# Altium PCB front_7_ea7gib8.PcbDoc
Units mil, origin at the board's own origin, x right, y up, seen from the top; angles counter-clockwise.
Board outline 11127.6 x 5706 mil, 2 copper layers (Top, Bottom); 142 components, 10 nets, 140 pads, 27 vias.
Unrouted connection lines stored in the file: 18.
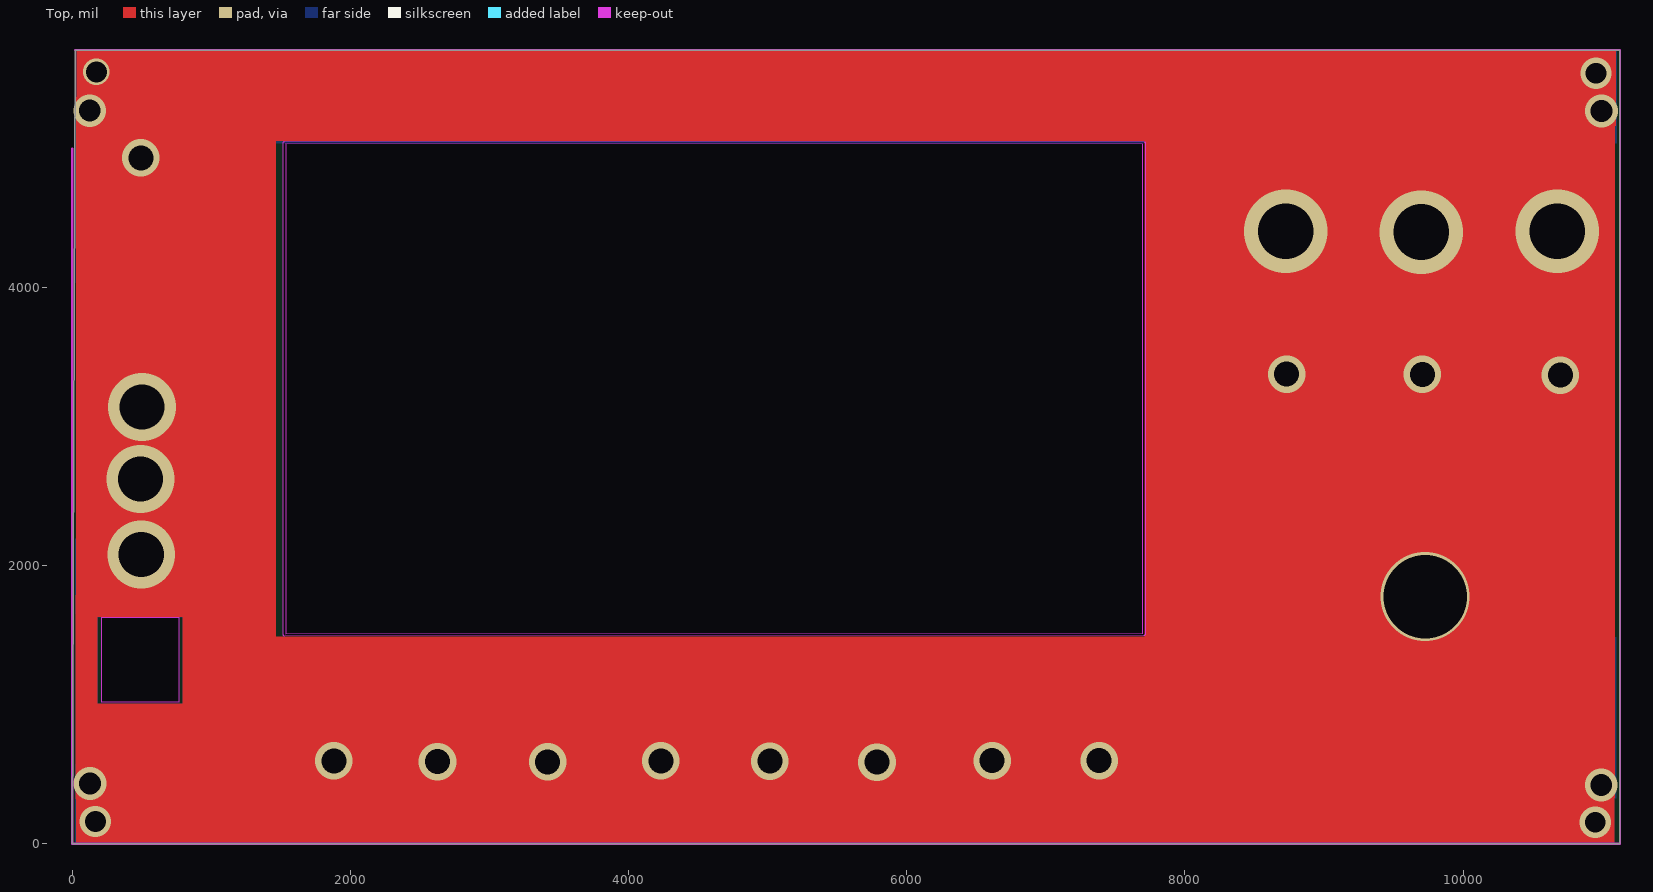
[diagram p0: Top view]
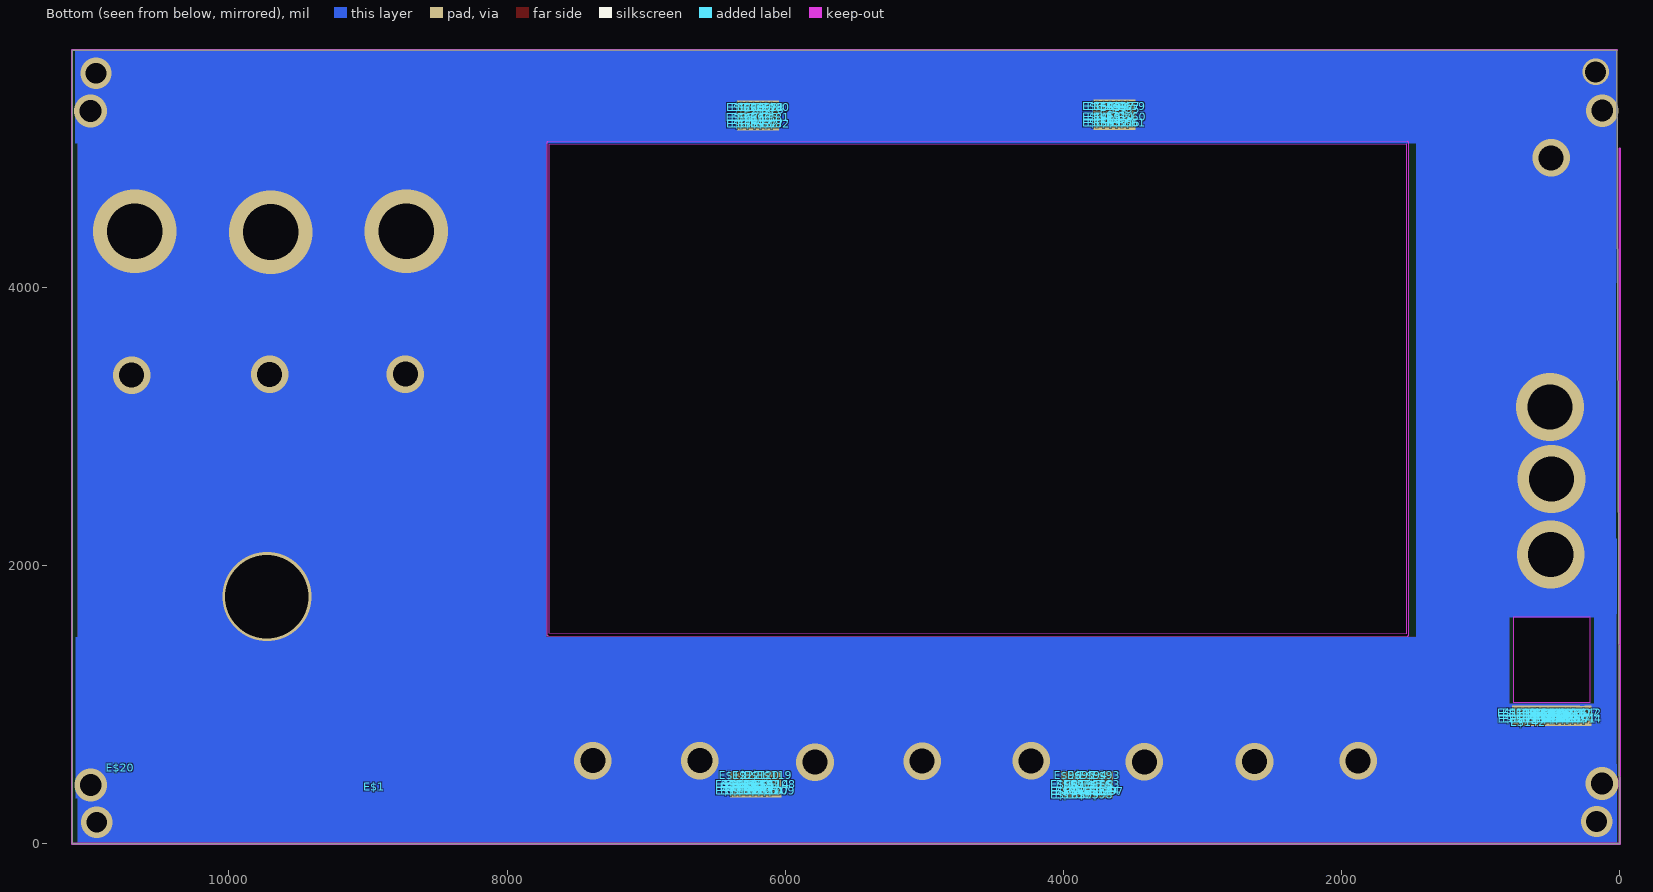
[diagram p1: Bottom view, seen from below]

## Layer stack, top to bottom
Top Solder: solder mask 0.4, Solder Resist, Dk 3.5
Top: signal copper 1.378
Dielectric 1: dielectric 12.6, FR-4, Dk 4.8
Bottom: signal copper 1.378
Bottom Solder: solder mask 0.4, Solder Resist, Dk 3.5

## Board outline
22.8,5706 11127.6,5706 11127.6,0 0,0 0,7.2 1.2,7.2
cut-out: 1535.41,5032.29 1535.41,4821 1535.56,4820.78 1536.18,4817.66 1536.18,1508.89 7697.63,1513.16 7698.48,5029.9
cut-out: 7706.64,5046.21 7708.42,5045.85 7709.76,5045.59 7709.76,5045.58 7711.24,5044.6 7712.41,5043.82 7713.19,5042.64 7714.18,5041.17 7714.44,5039.82 7714.8,5038.05 7713.94,1505.01 7713.63,1503.49 7713.32,1501.89 7713.31,1501.89 7712.46,1500.61 7711.55,1499.25 7711.55,1499.24 7710.18,1498.33 7708.91,1497.48 7708.9,1497.48 7708.9,1497.47 7707.31,1497.16 7705.79,1496.85 1528.03,1492.57 1528.02,1492.57 1526.49,1492.88 1524.9,1493.19 1523.61,1494.06 1522.26,1494.96 1522.25,1494.96 1521.35,1496.31 1520.49,1497.6 1520.49,1497.61 1520.48,1497.61 1520.17,1499.19 1519.86,1500.72 1519.86,1500.73 1519.86,4780.52 1519.71,4780.74 1519.09,4783.86 1519.09,5040.45 1519.41,5042.03 1519.71,5043.57 1519.72,5043.57 1520.6,5044.9 1521.48,5046.22 1522.8,5047.1 1524.13,5047.99 1525.7,5048.3 1527.25,5048.61
cut-out: 212.98,1018.45 212.98,1628.01 766.33,1628.01 766.33,1018.45

## Design rules (kind name [scope] priority, off if disabled: settings)
BoardOutlineClearance mdCopperDimension [All] p1: gap=10 ignorepadtopadclearanceinfootprint=FALSE except(0: Arc-SplitContinuation Track-SplitContinuation SMDPad-SplitContinuation THPad-SplitContinuation Via-SplitContinuation Fill-SplitContinuation Poly-SplitContinuation Region-SplitContinuation Text-SplitContinuation; 40: Poly-OutlineEdge Poly-CavityEdge Poly-CutoutEdge Poly-SplitBarrior)
Clearance "Clearance (Same Net)" [All] p1: gap=8 ignorepadtopadclearanceinfootprint=FALSE
Clearance [All] p2: gap=8 ignorepadtopadclearanceinfootprint=FALSE
HoleSize [All] p1: absolutevalues=TRUE maxlimit=100000 minlimit=24 maxpercent=80.000 minpercent=20.000
HoleToHoleClearance mdDrill [All] p1: gap=8 allowstackedmicrovias=TRUE
MinimumSolderMaskSliver [All] p1 off: minsoldermaskwidth=10
PasteMaskExpansion mlMinCreamFrame [All] p1: expansion=0
PolygonConnect ThermalVias [IsVia] p1: connectstyle=Direct reliefconductorwidth=10 reliefentries=4 polygonreliefangle="90 Angle" airgapwidth=10
PolygonConnect [All] p2: connectstyle=Relief reliefconductorwidth=10 reliefentries=4 polygonreliefangle="90 Angle" airgapwidth=10
RoutingVias [All] p1: holewidth=24 width=40 viastyle="Through Hole" minholewidth=24 minwidth=40 maxholewidth=100 maxwidth=100
SolderMaskExpansion mlMinStopFrame [All] p1: expansion=4 istentingtop=FALSE
Width [All] p1: maxlimit=10000 minlimit=10 preferedwidth=10
26 further rules are at their usual default settings.

## Components (designator, comment, footprint, x,y, rotation, side; value= is the part's Value field where it differs from the comment)
E$1 "" CC-NC-BY 8955.6,411.6 r180 bottom
E$2 "" SMD1,27-2,54 3837.6,384 r180 bottom
E$3 "" SMD1,27-2,54 3668.4,428.4 r180 bottom
E$4 "" SMD1,27-2,54 3669.6,382.8 r180 bottom
E$5 "" SMD1,27-2,54 3793.2,428.4 r180 bottom
E$6 "" SMD1,27-2,54 3921.6,382.8 r180 bottom
E$7 "" SMD1,27-2,54 3922.8,428.4 r180 bottom
E$8 "" SMD1,27-2,54 3711.6,427.2 r180 bottom
E$9 "" SMD1,27-2,54 6146.4,411.6 r180 bottom
E$10 "" SMD1,27-2,54 310.8,943.2 r180 bottom
E$11 "" SMD1,27-2,54 6188.4,411.6 r180 bottom
E$12 "" SMD1,27-2,54 405.6,943.2 r180 bottom
E$13 "" SMD1,27-2,54 450,943.2 r180 bottom
E$14 "" SMD1,27-2,54 3588,5227.2 r180 bottom
E$15 "" SMD1,27-2,54 3682.8,5227.2 r180 bottom
E$16 "" SMD1,27-2,54 3748.8,428.4 r180 bottom
E$17 "" SMD1,27-2,54 310.8,897.6 r180 bottom
E$18 "" SMD1,27-2,54 3843.6,428.4 r180 bottom
E$19 "" SMD1,27-2,54 3888,428.4 r180 bottom
E$20 "" EA5GVK1 10779.6,547.2 r180 bottom
E$21 "" SMD1,27-2,54 422.4,943.2 r180 bottom
E$22 "" SMD1,27-2,54 517.2,943.2 r180 bottom
E$23 "" SMD1,27-2,54 561.6,943.2 r180 bottom
E$24 "" SMD1,27-2,54 3748.8,382.8 r180 bottom
E$25 "" SMD1,27-2,54 3792,382.8 r180 bottom
E$26 "" SMD1,27-2,54 422.4,897.6 r180 bottom
E$27 "" SMD1,27-2,54 3888,382.8 r180 bottom
E$28 "" SMD1,27-2,54 465.6,897.6 r180 bottom
E$29 "" SMD1,27-2,54 3709.2,382.8 r180 bottom
E$30 "" SMD1,27-2,54 561.6,897.6 r180 bottom
E$31 "" SMD1,27-2,54 6229.2,411.6 r180 bottom
E$32 "" SMD1,27-2,54 6277.2,411.6 r180 bottom
E$33 "" SMD1,27-2,54 6324,411.6 r180 bottom
E$34 "" SMD1,27-2,54 6368.4,411.6 r180 bottom
E$35 "" SMD1,27-2,54 382.8,897.6 r180 bottom
E$36 "" SMD1,27-2,54 342,943.2 r180 bottom
E$37 "" SMD1,27-2,54 343.2,897.6 r180 bottom
E$38 "" SMD1,27-2,54 595.2,897.6 r180 bottom
E$39 "" SMD1,27-2,54 354,897.6 r180 bottom
E$40 "" SMD1,27-2,54 450,897.6 r180 bottom
E$41 "" SMD1,27-2,54 271.2,897.6 r180 bottom
E$42 "" SMD1,27-2,54 230.4,943.2 r180 bottom
E$43 "" SMD1,27-2,54 596.4,943.2 r180 bottom
E$44 "" SMD1,27-2,54 231.6,897.6 r180 bottom
E$45 "" SMD1,27-2,54 511.2,898.8 r180 bottom
E$46 "" SMD1,27-2,54 3727.2,5227.2 r180 bottom
E$47 "" SMD1,27-2,54 3588,5300.4 r180 bottom
E$48 "" SMD1,27-2,54 3636,5300.4 r180 bottom
E$49 "" SMD1,27-2,54 3684,5300.4 r180 bottom
E$50 "" SMD1,27-2,54 3727.2,5300.4 r180 bottom
E$51 "" SMD1,27-2,54 3588,5181.6 r180 bottom
E$52 "" SMD1,27-2,54 3631.2,5181.6 r180 bottom
E$53 "" SMD1,27-2,54 3681.6,5181.6 r180 bottom
E$54 "" SMD1,27-2,54 3727.2,5181.6 r180 bottom
E$55 "" SMD1,27-2,54 3548.4,5281.2 r180 bottom
E$56 "" SMD1,27-2,54 3548.4,5181.6 r180 bottom
E$57 "" SMD1,27-2,54 3548.4,5300.4 r180 bottom
E$58 "" SMD1,27-2,54 3634.8,5245.2 r180 bottom
E$59 "" SMD1,27-2,54 3508.8,5300.4 r180 bottom
E$60 "" SMD1,27-2,54 3507.6,5227.2 r180 bottom
E$61 "" SMD1,27-2,54 3508.8,5181.6 r180 bottom
E$62 "" SMD1,27-2,54 3760.8,5300.4 r180 bottom
E$63 "" SMD1,27-2,54 3760.8,5181.6 r180 bottom
E$64 "" SMD1,27-2,54 3762,5227.2 r180 bottom
E$65 "" SMD1,27-2,54 6148.8,5221.2 r180 bottom
E$66 "" SMD1,27-2,54 6243.6,5221.2 r180 bottom
E$67 "" SMD1,27-2,54 6288,5221.2 r180 bottom
E$68 "" SMD1,27-2,54 6148.8,5294.4 r180 bottom
E$69 "" SMD1,27-2,54 6196.8,5294.4 r180 bottom
E$70 "" SMD1,27-2,54 6244.8,5294.4 r180 bottom
E$71 "" SMD1,27-2,54 6288,5294.4 r180 bottom
E$72 "" SMD1,27-2,54 6148.8,5175.6 r180 bottom
E$73 "" SMD1,27-2,54 6192,5175.6 r180 bottom
E$74 "" SMD1,27-2,54 6242.4,5175.6 r180 bottom
E$75 "" SMD1,27-2,54 6288,5175.6 r180 bottom
E$76 "" SMD1,27-2,54 6109.2,5275.2 r180 bottom
E$77 "" SMD1,27-2,54 6109.2,5175.6 r180 bottom
E$78 "" SMD1,27-2,54 6109.2,5294.4 r180 bottom
E$79 "" SMD1,27-2,54 6195.6,5239.2 r180 bottom
E$80 "" SMD1,27-2,54 6069.6,5294.4 r180 bottom
E$81 "" SMD1,27-2,54 6068.4,5221.2 r180 bottom
E$82 "" SMD1,27-2,54 6069.6,5175.6 r180 bottom
E$83 "" SMD1,27-2,54 6321.6,5294.4 r180 bottom
E$84 "" SMD1,27-2,54 6321.6,5175.6 r180 bottom
E$85 "" SMD1,27-2,54 6322.8,5221.2 r180 bottom
E$86 "" SMD1,27-2,54 466.8,943.2 r180 bottom
E$87 "" SMD1,27-2,54 385.2,942 r180 bottom
E$88 "" SMD1,27-2,54 3952.8,428.4 r180 bottom
E$89 "" SMD1,27-2,54 3954,382.8 r180 bottom
E$90 "" SMD1,27-2,54 3991.2,428.4 r180 bottom
E$91 "" SMD1,27-2,54 3991.2,381.6 r180 bottom
E$92 "" SMD1,27-2,54 6132,428.4 r180 bottom
E$93 "" SMD1,27-2,54 3693.6,493.2 r270 bottom
E$94 "" SMD1,27-2,54 3781.2,493.2 r270 bottom
E$95 "" SMD1,27-2,54 3868.8,493.2 r270 bottom
E$96 "" SMD1,27-2,54 3967.2,493.2 r270 bottom
E$97 "" SMD1,27-2,54 3668.4,378 r0 bottom
E$98 "" SMD1,27-2,54 3742.8,352.8 r270 bottom
E$99 "" SMD1,27-2,54 3838.8,352.8 r270 bottom
E$100 "" SMD1,27-2,54 3933.6,352.8 r270 bottom
E$101 "" SMD1,27-2,54 3967.2,352.8 r270 bottom
E$102 "" SMD1,27-2,54 6226.8,428.4 r180 bottom
E$103 "" SMD1,27-2,54 6271.2,428.4 r180 bottom
E$104 "" SMD1,27-2,54 6132,382.8 r180 bottom
E$105 "" SMD1,27-2,54 6175.2,382.8 r180 bottom
E$106 "" SMD1,27-2,54 6271.2,382.8 r180 bottom
E$107 "" SMD1,27-2,54 6092.4,382.8 r180 bottom
E$108 "" SMD1,27-2,54 6051.6,428.4 r180 bottom
E$109 "" SMD1,27-2,54 6052.8,382.8 r180 bottom
E$110 "" SMD1,27-2,54 6304.8,382.8 r180 bottom
E$111 "" SMD1,27-2,54 6306,428.4 r180 bottom
E$112 "" SMD1,27-2,54 6220.8,384 r180 bottom
E$113 "" SMD1,27-2,54 6176.4,428.4 r180 bottom
E$114 "" SMD1,27-2,54 6094.8,427.2 r180 bottom
E$115 "" SMD1,27-2,54 6336,428.4 r180 bottom
E$116 "" SMD1,27-2,54 6337.2,382.8 r180 bottom
E$117 "" SMD1,27-2,54 6374.4,428.4 r180 bottom
E$118 "" SMD1,27-2,54 6374.4,381.6 r180 bottom
E$119 "" SMD1,27-2,54 6076.8,493.2 r270 bottom
E$120 "" SMD1,27-2,54 6164.4,493.2 r270 bottom
E$121 "" SMD1,27-2,54 6252,493.2 r270 bottom
E$122 "" SMD1,27-2,54 6350.4,493.2 r270 bottom
E$123 "" SMD1,27-2,54 483.6,897.6 r180 bottom
E$124 "" SMD1,27-2,54 484.8,943.2 r180 bottom
E$125 "" SMD1,27-2,54 399.6,898.8 r180 bottom
E$126 "" SMD1,27-2,54 355.2,943.2 r180 bottom
E$127 "" SMD1,27-2,54 273.6,942 r180 bottom
E$128 "" SMD1,27-2,54 577.2,943.2 r180 bottom
E$129 "" SMD1,27-2,54 672,943.2 r180 bottom
E$130 "" SMD1,27-2,54 716.4,943.2 r180 bottom
E$131 "" SMD1,27-2,54 577.2,897.6 r180 bottom
E$132 "" SMD1,27-2,54 620.4,897.6 r180 bottom
E$133 "" SMD1,27-2,54 716.4,897.6 r180 bottom
E$134 "" SMD1,27-2,54 537.6,897.6 r180 bottom
E$135 "" SMD1,27-2,54 496.8,943.2 r180 bottom
E$136 "" SMD1,27-2,54 498,897.6 r180 bottom
E$137 "" SMD1,27-2,54 750,897.6 r180 bottom
E$138 "" SMD1,27-2,54 751.2,943.2 r180 bottom
E$139 "" SMD1,27-2,54 666,898.8 r180 bottom
E$140 "" SMD1,27-2,54 621.6,943.2 r180 bottom
E$141 "" SMD1,27-2,54 540,942 r180 bottom
E$142 "" SMD1,27-2,54 661.2,872.4 r90 bottom

## Footprints (in the part's own frame and the unit in brackets; to place one, negate y for a bottom-side part, rotate by r counter-clockwise, add the part's x,y. Pads: shape width x height; smd on the part's side, far side on the other; paste and mask are expansions set on the pad)
CC-NC-BY [mil] "CC-NC-BY"
EA5GVK1 [mil] "EA5GVK1"
SMD1,27-2,54 [mil] "SMD1,27-2,54"
  rect 50x100 smd: 1(0,0)

## Part data
E$1: library part CC-NC-BY, PackageName=CC-NC-BY
E$2 E$3 E$4 E$5 E$6 E$7 E$8 E$9 E$10 E$11 E$12 E$13 E$14 E$15 E$16 E$17 E$18 E$19 E$21 E$22 E$23 E$24 E$25 E$26 E$27 E$28 E$29 E$30 E$31 E$32 E$33 E$34 E$35 E$36 E$37 E$38 E$39 E$40 E$41 E$42 E$43 E$44 E$45 E$46 E$47 E$48 E$49 E$50 E$51 E$52 E$53 E$54 E$55 E$56 E$57 E$58 E$59 E$60 E$61 E$62 E$63 E$64 E$65 E$66 E$67 E$68 E$69 E$70 E$71 E$72 E$73 E$74 E$75 E$76 E$77 E$78 E$79 E$80 E$81 E$82 E$83 E$84 E$85 E$86 E$87 E$88 E$89 E$90 E$91 E$92 E$93 E$94 E$95 E$96 E$97 E$98 E$99 E$100 E$101 E$102 E$103 E$104 E$105 E$106 E$107 E$108 E$109 E$110 E$111 E$112 E$113 E$114 E$115 E$116 E$117 E$118 E$119 E$120 E$121 E$122 E$123 E$124 E$125 E$126 E$127 E$128 E$129 E$130 E$131 E$132 E$133 E$134 E$135 E$136 E$137 E$138 E$139 E$140 E$141 E$142: library part SMD1,27-2,54, PackageName=SMD1,27-2,54
E$20: library part EA5GVK1, PackageName=EA5GVK1

## Via types
v1: diameter 270/270 (per signal layer), hole 180, Top to Bottom, 12 vias
v2: diameter 236.22/236.22 (per signal layer), hole 157.48, Top to Bottom, 4 vias
v3: diameter 225/225 (per signal layer), hole 150, Top to Bottom, 3 vias
v4: diameter 600/600 (per signal layer), hole 400, Top to Bottom, 3 vias
v5: diameter 487.5/487.5 (per signal layer), hole 325, Top to Bottom, 3 vias
v6: diameter 190/190 (per signal layer), hole 150, Top to Bottom, 1 vias
v7: diameter 640/640 (per signal layer), hole 600, Top to Bottom, 1 vias

## Nets (pads, with @x,y where several pads share a name; then routed paths per layer and width w, separated by ;. In a path a pad name is that pad's centre, name@x,y a point inside that pad or via, vN(x,y) a via of type N, cw(c..) or ccw(c..) an arc to the next point about the centre after c; other vN are vias at no path point)
S$1: 
  other v7: 9727.51,1776.57
S$2: 
  other v4: 9698.9,4397.51 8724.68,4402.21
  other v5: 497.6,2078.53 493.09,2622.5 503.41,3140.22
S$3: 
  other v4: 10675.99,4402.31
S$4: 
  other v1: 5786.77,587.63 3419.17,588.83 2627.17,590.03 5016.37,593.63 1881.97,596.03 4232.77,596.03 6613.57,597.23 7383.97,597.23 10699.57,3369.23 9707.17,3374.03 8731.57,3376.43 494.4,4930.08
S$5: 
  other v2: 10993.06,423.73 129.83,432.23 10994.45,5268.59 127.52,5269.69
S$7: 
  other v6: 175.2,5548.8
S$8:  | length 1795.2
  Top w16: 8929.2,1977.6 10718.4,1977.6 10718.4,1971.6
S$9: 
  other v3: 10954.8,5539.2
S$10: 
  other v3: 168,160.8
S$11: 
  other v3: 10950,154.8
pads on no net: E$2.1 E$3.1 E$4.1 E$5.1 E$6.1 E$7.1 E$8.1 E$9.1 E$10.1 E$11.1 E$12.1 E$13.1 E$14.1 E$15.1 E$16.1 E$17.1 E$18.1 E$19.1 E$21.1 E$22.1 E$23.1 E$24.1 E$25.1 E$26.1 E$27.1 E$28.1 E$29.1 E$30.1 E$31.1 E$32.1 E$33.1 E$34.1 E$35.1 E$36.1 E$37.1 E$38.1 E$39.1 E$40.1 E$41.1 E$42.1 E$43.1 E$44.1 E$45.1 E$46.1 E$47.1 E$48.1 E$49.1 E$50.1 E$51.1 E$52.1 E$53.1 E$54.1 E$55.1 E$56.1 E$57.1 E$58.1 E$59.1 E$60.1 E$61.1 E$62.1 E$63.1 E$64.1 E$65.1 E$66.1 E$67.1 E$68.1 E$69.1 E$70.1 E$71.1 E$72.1 E$73.1 E$74.1 E$75.1 E$76.1 E$77.1 E$78.1 E$79.1 E$80.1 E$81.1 E$82.1 E$83.1 E$84.1 E$85.1 E$86.1 E$87.1 E$88.1 E$89.1 E$90.1 E$91.1 E$92.1 E$93.1 E$94.1 E$95.1 E$96.1 E$97.1 E$98.1 E$99.1 E$100.1 E$101.1 E$102.1 E$103.1 E$104.1 E$105.1 E$106.1 E$107.1 E$108.1 E$109.1 E$110.1 E$111.1 E$112.1 E$113.1 E$114.1 E$115.1 E$116.1 E$117.1 E$118.1 E$119.1 E$120.1 E$121.1 E$122.1 E$123.1 E$124.1 E$125.1 E$126.1 E$127.1 E$128.1 E$129.1 E$130.1 E$131.1 E$132.1 E$133.1 E$134.1 E$135.1 E$136.1 E$137.1 E$138.1 E$139.1 E$140.1 E$141.1 E$142.1

## Keep-outs
Keep-Out Layer:
  lines w16: 1.2,4996.8 1.2,7.2 0,7.2 0,0 11127.6,0 11127.6,5706 22.8,5706

## Other copper
Top:
  region: 30,12 30,577.2 11088,577.2 11088,12
  region: 34.8,5161.2 34.8,5697.6 11098.8,5697.6 11098.8,5161.2
  region: 50.4,936 50.4,1776 181.2,1776 181.2,936
  region: 120,938.4 120,1005.6 1032,1005.6 1032,938.4
  region: 796.8,937.2 796.8,1738.8 894,1738.8 894,937.2
  region: 86.4,1630.8 86.4,1758 967.2,1758 967.2,1630.8
  region: 948,1243.2 948,5190 1466.4,5190 1466.4,1243.2
  region: 7712.4,868.8 7712.4,5258.4 9024,5258.4 9024,868.8
  region: 1065.6,5052 1065.6,5295.6 8554.8,5295.6 8554.8,5052
  region: 7737.6,1286.4 7737.6,5158.8 7984.8,5158.8 7984.8,1286.4
  region: 938.4,1330.8 938.4,5167.2 1455.6,5167.2 1455.6,1330.8
  region: 1066.8,5068.8 1066.8,5218.8 8029.2,5218.8 8029.2,5068.8
  region: 1041.6,1261.2 1041.6,5227.2 1411.2,5227.2 1411.2,1261.2
  region: 831.6,782.4 831.6,1742.4 963.6,1742.4 963.6,782.4
  region: 67.2,1648.8 67.2,1840.8 968.4,1840.8 968.4,1648.8
  region: 73.2,326.4 73.2,991.2 1026,991.2 1026,326.4
  region: 25.2,324 25.2,1786.8 152.4,1786.8 152.4,324
  region: 841.2,330 841.2,2218.8 1147.2,2218.8 1147.2,330
  region: 1010.4,1318.8 1010.4,5246.4 1404,5246.4 1404,1318.8
  region: 7768.8,1202.4 7768.8,5228.4 8080.8,5228.4 8080.8,1202.4
  region: 1244.4,5130 1244.4,5355.6 8066.4,5355.6 8066.4,5130
  region: 883.2,331.2 883.2,1488 8035.2,1488 8035.2,331.2
  region: 7856.4,330 7856.4,5352 11091.6,5352 11091.6,330
  region: 28.8,1675.2 28.8,5365.2 1365.6,5365.2 1365.6,1675.2
Bottom:
  region: 24,12 24,570 11088,570 11088,12
  region: 25.2,5035.2 25.2,5701.2 11104.8,5701.2 11104.8,5035.2
  region: 104.4,902.4 104.4,1694.4 183.6,1694.4 183.6,902.4
  region: 124.8,926.4 124.8,1006.8 963.6,1006.8 963.6,926.4
  region: 794.4,928.8 794.4,1783.2 948,1783.2 948,928.8
  region: 114,925.2 114,1004.4 978,1004.4 978,925.2
  region: 64.8,932.4 64.8,1729.2 181.2,1729.2 181.2,932.4
  region: 102,1628.4 102,1748.4 950.4,1748.4 950.4,1628.4
  region: 7718.4,1404 7718.4,5115.6 7887.6,5115.6 7887.6,1404
  region: 1105.2,1460.4 1105.2,5089.2 1465.2,5089.2 1465.2,1460.4
  region: 1183.2,5052 1183.2,5302.8 7909.2,5302.8 7909.2,5052
  region: 1344,5136 1344,5356.8 8061.6,5356.8 8061.6,5136
  region: 27.6,4033.2 27.6,5360.4 1404,5360.4 1404,4033.2
  region: 31.2,1873.2 31.2,4311.6 1407.6,4311.6 1407.6,1873.2
  region: 26.4,878.4 26.4,1773.6 152.4,1773.6 152.4,878.4
  region: 826.8,1279.2 826.8,1939.2 1411.2,1939.2 1411.2,1279.2
  region: 22.8,1652.4 22.8,2192.4 1407.6,2192.4 1407.6,1652.4
  region: 26.4,333.6 26.4,992.4 982.8,992.4 982.8,333.6
  region: 834,328.8 834,1483.2 11101.2,1483.2 11101.2,328.8
  region: 7762.8,343.2 7762.8,5359.2 11085.6,5359.2 11085.6,343.2

## Silkscreen, mask and mechanical layers (free items; w line width, h text height)
Dimension:
  lines w16: 0,4734 0,5704.8 92.4,5704.8 ; 1.2,4996.8 1.2,7.2 0,7.2 0,0 11127.6,0 11127.6,5706 22.8,5706 ; 1527.25,4783.86 1527.25,5040.45 7706.64,5038.05 7705.78,1505.01 1528.02,1500.73 1528.02,4817.66 ; 212.98,1018.45 212.98,1628.01 766.33,1628.01 766.33,1018.45 212.98,1018.45
tPlace:
  drawing of 1418 lines, arcs and shapes, not listed
  text "Shift/Gain" at 8417.46,4857.8 h183.07
  text "ENC2" at 9515.46,4848.2 h183.07
  text "AF GAIN" at 10345.86,4842.2 h183.07
  text "POWER" at 269.46,4591.4 h183.07
  text "BAND+" at 10410.42,3741.86 h183.07
  text "MODE+" at 9460.06,3740.12 h183.07
  text "A/B" at 8587.79,3736.01 h183.07
  text "BAND-" at 10410.42,3564.69 h183.07
  text "MODE-" at 9460.06,3562.96 h183.07
  text "UA3REO" at 267.19,3560.58 h232.5
  text "A=B" at 8587.79,3558.84 h183.07
  text "AUDIO1" at 772.26,3103.4 h155
  text "AUDIO2" at 755.46,2593.41 h155
  text "AUDIO3" at 756.66,2035.4 h155
  text "EA7GIB" at 11009.64,1353.74 h232.5 r90
  text "F8" at 7295.39,804.84 h183.07
  text "F1" at 1824.59,803.64 h183.07
  text "F2" at 2562.59,801.24 h183.07
  text "F4" at 4139.39,800.04 h183.07
  text "F7" at 6528.59,796.44 h183.07
  text "F3" at 3335.39,795.24 h183.07
  text "F5" at 4925.39,795.24 h183.07
  text "F6" at 5682.59,788.04 h183.07
  text "MIC" at 241.18,679.14 h310
  text "UA3REO" at 9300.15,395.16 h232.5
  text "C:/Users/User/Desktop/LOBO.bmp" at 16.8,312 h2.04
bPlace:
  region: 10806,3.6 10806,303.6 11098.8,303.6 11098.8,3.6
  region: 24,9.6 24,309.6 316.8,309.6 316.8,9.6
  region: 10808.4,5394 10808.4,5694 11101.2,5694 11101.2,5394
  region: 31.2,5397.6 31.2,5697.6 324,5697.6 324,5397.6
  lines w16: 16.8,318 11114.67,309.6 ; 16.8,5390.44 11112.27,5382.04
  lines w60: 10207.2,424.8 10807.2,424.8 ; 10959.6,646.8 10959.6,1246.8
  text "EA7GIB" at 10858.44,1354.94 h232.5 r270
  text "by EA7GIB v2" at 8505.75,800.76 h232.5
  text "UA3REO" at 10065.75,395.16 h232.5
Unrouted:
  lines w0: 127.52,5269.69 129.83,432.23 10993.06,423.73 10994.45,5268.59 ; 494.4,4930.08 1797.89,608.03 ; 497.6,2078.53 493.09,2622.5 503.41,3140.22 8724.68,4402.21 9698.9,4397.51 ; 5016.37,593.63 1797.89,608.03 ; 10699.57,3369.23 9707.17,3374.03 8731.57,3376.43 7298.78,611.72 6531.98,612.83 5698.94,603.32 4931.52,605.72 4144.83,606.92 3334.77,602.12 2540.97,604.43 1797.89,608.03

## Text inside footprints (layer, text, board x,y; h text height)
E$20: tPlace "C:/Users/user/Desktop/Untitled.bmp" at 10779.6,544.25 h1